# Altium PCB KickerSensor.PcbDoc
Units mm, origin at the board's own origin, x right, y up, seen from the top; angles counter-clockwise.
Board outline 12.95 x 16.3 mm, 2 copper layers (Top Layer, Bottom Layer); 4 components, 5 nets, 13 pads, 0 vias.
Unrouted connection lines stored in the file: 2.
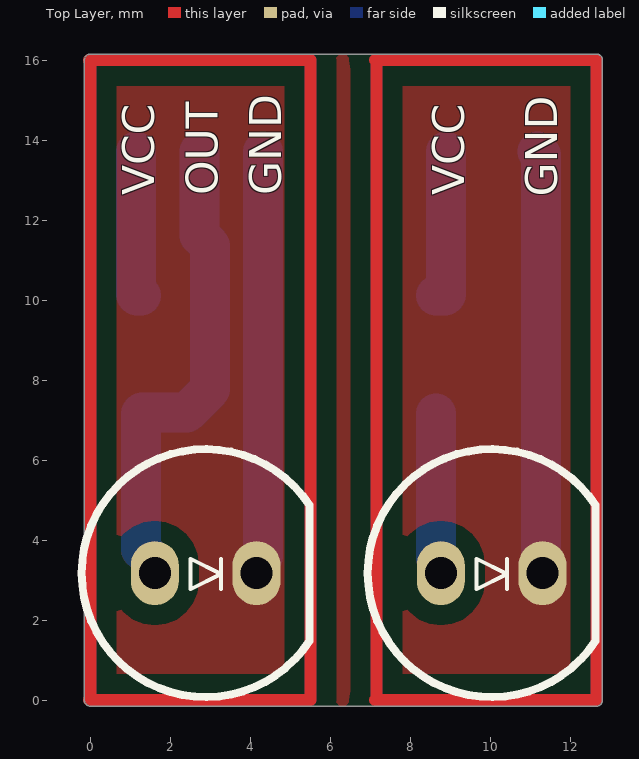
[diagram p0: Top Layer view]
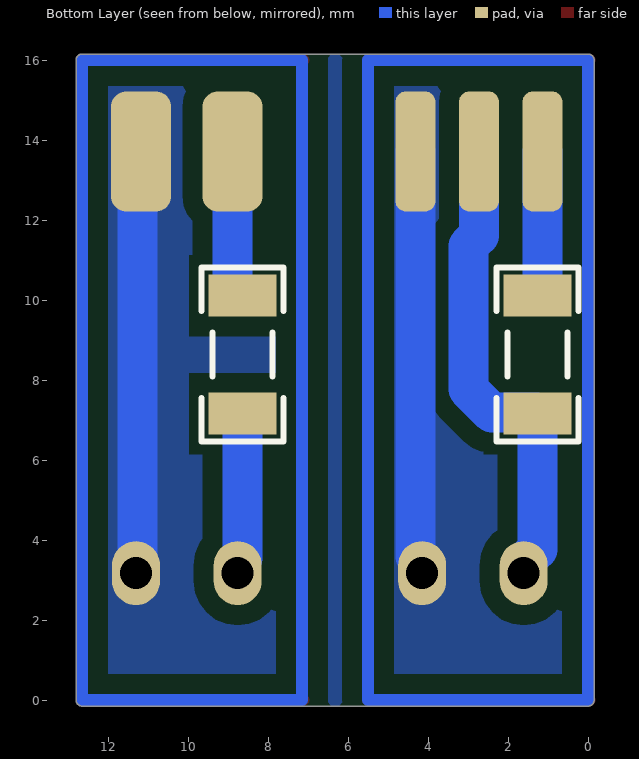
[diagram p1: Bottom Layer view, seen from below]

## Layer stack, top to bottom
Top Solder: solder mask 0.0102, Solder Resist, Dk 3.5
Top Layer: signal copper 0.0356
Dielectric 1: dielectric 0.32, FR-4, Dk 4.8
Bottom Layer: signal copper 0.0356
Bottom Solder: solder mask 0.0102, Solder Resist, Dk 3.5

## Board outline
-0.15,0 -0.15,15.999 cw(c0,16) -0.106,16.106 cw(c0,16) 0.001,16.15 7.151,16.15 ccw(c7.151,16.121) 7.15,16.15 7.151,16.15 12.651,16.15 cw(c12.651,16) 12.801,16 12.801,0 cw(c12.651,0) 12.651,-0.15 0,-0.15 cw(c0,0)

## Design rules (kind name [scope] priority, off if disabled: settings)
Clearance [All] p1: gap=0.254 ignorepadtopadclearanceinfootprint=FALSE except(0: Arc-Hole Track-Hole SMDPad-Hole THPad-Hole Via-Hole Fill-Hole Poly-Hole Region-Hole Text-Hole; 0.5: Arc-Fill Arc-Poly Arc-Region Track-Fill Track-Poly Track-Region SMDPad-Fill SMDPad-Poly SMDPad-Region THPad-Fill THPad-Poly THPad-Region Via-Fill Via-Poly Via-Region Fill-Fill Fill-Poly Fill-Region Poly-Poly Poly-Region Region-Region)
ComponentClearance [All] p1 off: gap=0.254 collisioncheckmode=3 verticalgap=0.254 showdistances=FALSE
Height [All] p1 off: minheight=0 maxheight=25.4 prefheight=12.7
PlaneConnect [All] p1: planeconnectstyle=Direct reliefexpansion=0.508 reliefentries=4 reliefconductorwidth=0.254 reliefairgap=0.254
PolygonConnect [All] p1: connectstyle=Direct reliefconductorwidth=0.254 reliefentries=4 polygonreliefangle="90 Angle" airgapwidth=0.254
RoutingVias [All] p1: holewidth=0.711 width=1.27 viastyle="Through Hole" minholewidth=0.711 minwidth=1.27 maxholewidth=0.711 maxwidth=1.27
SolderMaskExpansion [All] p1: expansion=0.102 istentingtop=FALSE
Width [All] p1 off: maxlimit=0.254 minlimit=0.254 preferedwidth=0.254
27 further rules are at their usual default settings.

## Components (designator, comment, footprint, x,y, rotation, side; value= is the part's Value field where it differs from the comment)
? "Comment" RES1206 1.27,8.636 r90 bottom
? "Comment" RES1206 8.636,8.636 r90 bottom
? "Comment" LED5MM_BLUE 2.882,3.175 r0 top
? "Comment" LED5MM_BLUE 10.033,3.175 r0 top

## Footprints (in the part's own frame and the unit in brackets; to place one, negate y for a bottom-side part, rotate by r counter-clockwise, add the part's x,y. Pads: shape width x height; smd on the part's side, far side on the other; paste and mask are expansions set on the pad)
LED5MM_BLUE [mm] "LED 5MM THROUGH HOLE BLUE-Designer Abbas Basereh"
  oval 1.2x1.6 hole 0.8: 1(-1.27,0) 2(1.27,0)
  silkscreen extent -3.1,-3.1 2.6,3.1, body extent -2.99,-2.98 2.43,3.04, height 12.31
RES1206 [mm] "Chip Resistor, 2-Leads, Body 3/20x1/60mm, IPC Medium Density DESIGNER:ABBAS BASEREH"
  rect 1.05x1.7 smd: 1(-1.475,0) 2(1.475,0)
  silkscreen extent -2.17,-1.02 2.17,1.02, body extent -1.65,-0.85 1.65,0.85, height 0.94

## Free pads (board coordinates)
  rrect50% 1x3 smd far side: 4(1.143,13.716) 4(2.73,13.716) 4(4.318,13.716)
  rrect50% 1.5x3 smd far side: 4(8.89,13.716) 4(11.176,13.716)

## Nets (pads, with @x,y where several pads share a name; then routed paths per layer and width w, separated by ;. In a path a pad name is that pad's centre, name@x,y a point inside that pad or via, vN(x,y) a via of type N, cw(c..) or ccw(c..) an arc to the next point about the centre after c; other vN are vias at no path point)
gnd: ?.2@4.152,3.175 ?.2@11.303,3.175 pad.4@4.318,13.716 pad.4@11.176,13.716 | length 21.2
  Bottom Layer w1: ?.2@4.152,3.175 4.152,3.429 4.318,3.595 pad.4@4.318,13.716 ; pad.4@11.176,13.716 11.265,13.627 11.265,3.213 ?.2@11.303,3.175
led: ?.1@8.636,7.161 ?.1@8.763,3.175 | length 4
  Bottom Layer w1: ?.1@8.636,7.161 8.636,3.556 8.763,3.429 ?.1@8.763,3.175
out: ?.1@1.27,7.161 ?.1@1.612,3.175 pad.4@2.73,13.716 | length 12.2
  Bottom Layer w1: ?.1@1.612,3.175 1.612,3.429 1.27,3.771 1.27,7.161 1.295,7.186 2.409,7.186 2.995,7.772 2.995,11.356 2.73,11.621 pad.4@2.73,13.716
res: 
vcc: ?.2@1.27,10.111 ?.2@8.636,10.111 pad.4@1.143,13.716 pad.4@8.89,13.716 | length 7.6
  Bottom Layer w1: pad.4@1.143,13.716 1.143,10.136 1.168,10.111 ?.2@1.27,10.111 ; ?.2@8.636,10.111 8.865,10.111 8.89,10.136 pad.4@8.89,13.716
copper on no net: | length 172.2
  Top Layer w0.3: -0.039,0 5.5,0 5.5,16 -0.039,16 ; 0,0 0,16 ; 7.112,0 12.651,0 12.651,16 7.112,16 ; 7.151,0 7.151,16
  Bottom Layer w0.3: 0,0 5.5,0 5.5,16 0,16 0,0 ; 7.151,0 7.151,16 12.651,16 12.651,0 7.151,0

## Polygon pours and split planes (outlines as drawn)
gnd on Bottom Layer "GND_L02_P003" (solid, pour order 3): -0.15,0 -0.15,15.999 cw(c0,16) -0.106,16.106 cw(c0,16) 0.001,16.15 7.151,16.15 ccw(c7.151,16.121) 7.15,16.15 7.151,16.15 12.651,16.15 cw(c12.651,16) 12.801,16 12.801,0 cw(c12.651,0) 12.651,-0.15 0,-0.15 cw(c0,0)
gnd on Top Layer "GND_L01_P004" (solid, pour order 4): -0.15,0 -0.15,15.999 cw(c0,16) -0.106,16.106 cw(c0,16) 0.001,16.15 7.151,16.15 ccw(c7.151,16.121) 7.15,16.15 7.151,16.15 12.651,16.15 cw(c12.651,16) 12.801,16 12.801,0 cw(c12.651,0) 12.651,-0.15 0,-0.15 cw(c0,0)

## Silkscreen, mask and mechanical layers (free items; w line width, h text height)
Top Overlay:
  text "VCC" at 1.598,12.626 h0.8 r90
  text "OUT" at 3.185,12.626 h0.8 r90
  text "GND" at 4.773,12.626 h0.8 r90
  text "VCC" at 9.345,12.626 h0.8 r90
  text "GND" at 11.675,12.582 h0.8 r90
Top Solder:
  lines w0.3: -0.039,0.024 5.5,0.024 5.5,16.024 -0.039,16.024 ; 0,0.024 0,16.024 ; 7.112,0.024 12.651,0.024 12.651,16.024 7.112,16.024 ; 7.151,0.024 7.151,16.024
Bottom Solder:
  lines w0.3: 0,0 5.5,0 5.5,16 0,16 0,0 ; 7.151,0 7.151,16 12.651,16 12.651,0 7.151,0
Mechanical 1:
  lines w0.3: 5.5,0 7.151,0 ; 5.5,0 0,0 0,16 5.5,16 ; 5.5,0 5.5,16 ; 5.5,16 7.151,16 ; 7.151,0 7.151,16 ; 7.151,0 12.651,0 12.651,16 7.151,16